# Altium PCB CSC v2.PcbDoc (part 2 of 2)
Units mm, origin at the board's own origin, x right, y up, seen from the top; angles counter-clockwise.
Board outline 100 x 70 mm, 4 copper layers (L1, L2, L3, L4), stack 0.592 mm thick; 124 components, 182 nets, 786 pads, 368 vias.
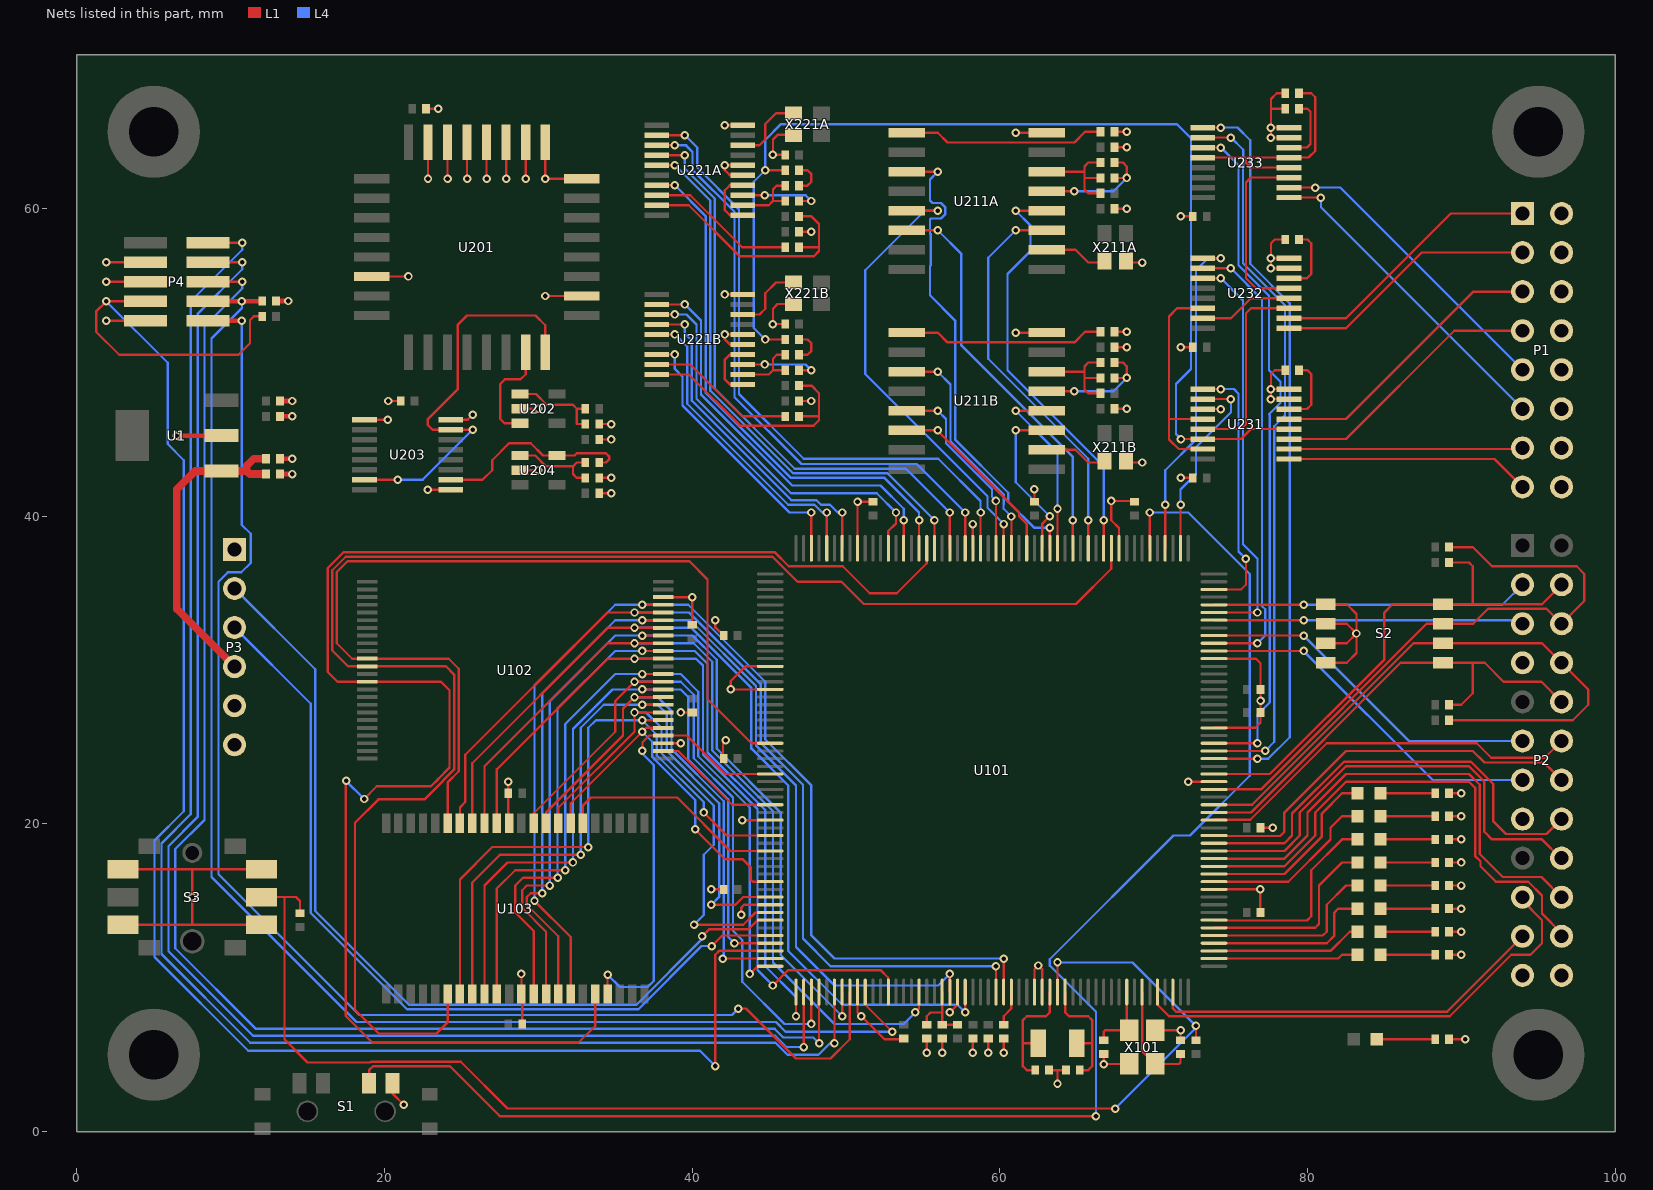
[diagram p4: the nets of this part, all layers, seen from the top]

## Via types
v1: diameter 0.55, hole 0.3, L1 to L4, tented both sides, 368 vias

## Nets (pads, with @x,y where several pads share a name; then routed paths per layer and width w, separated by ;. In a path a pad name is that pad's centre, name@x,y a point inside that pad or via, vN(x,y) a via of type N, cw(c..) or ccw(c..) an arc to the next point about the centre after c; other vN are vias at no path point) (continued)
BLS1: U101.139 U102.14 U103.40 | length 105.3
  L1 w0.15: v1(17.5,22.8) 17.475,22.775 17.475,7.525 19.225,5.775 32.6,5.775 33.7,6.875 U103.40@33.7,8.95 ; v1(18.675,21.625) 19.5,22.45 23.026,22.45 23.5,22.924 23.5,22.949 24.225,23.674 24.225,28.7 23.675,29.25 U102.14@18.875,29.25 16.944,29.25 16.3,29.894 16.3,36.626 17.349,37.675 45.349,37.675 46.274,36.75 49.793,36.75 51.543,35 51.957,35 53.3,35 55.25,36.95 U101.139@55.25,37.925
  L4 w0.15: v1(17.5,22.8) v1(18.675,21.625)
COMS.AFSK1.DET: U101.120 U211A.14 | length 26.3
  L1 w0.15: U211A.14@53.95,58.595 v1(55.96,58.595) ; U101.120@64.75,37.925 v1(64.75,39.75)
  L4 w0.15: v1(55.96,58.595) 57.5,57.055 57.5,51.112 64.75,43.862 v1(64.75,39.75)
COMS.AFSK1.M0: U101.118 U211A.3 | length 26.1
  L1 w0.15: v1(61.04,58.595) U211A.3@63.05,58.595 ; U101.118@65.75,37.925 v1(65.75,39.75)
  L4 w0.15: v1(61.04,58.595) 59.25,56.805 59.25,50.25 65.75,43.75 v1(65.75,39.75)
COMS.AFSK1.M1: U101.116 U211A.4 | length 27.6
  L1 w0.15: v1(61.04,59.865) U211A.4@63.05,59.865 ; U101.116@66.75,37.925 v1(66.75,39.75)
  L4 w0.15: v1(61.04,59.865) 62,58.905 62,57.25 60.5,55.75 60.5,49.5 66.75,43.25 v1(66.75,39.75)
COMS.AFSK1.RXD: U101.129 U211A.13 | length 30.1
  L1 w0.14: U101.129@60.25,37.925 v1(60.25,39.5)
  L1 w0.15: U211A.13@53.95,59.865 v1(55.96,59.865)
  L4 w0.14: v1(55.96,59.865) 55.115,59.865 51.25,56 51.25,49.25 59.21,41.29 59.21,40.54 v1(60.25,39.5)
COMS.AFSK1.TXD: U101.123 U211A.11 | length 32.1
  L1 w0.15: U211A.11@53.95,62.405 v1(55.96,62.405) ; U101.123@63.25,37.925 v1(63.25,39.25)
  L4 w0.15: v1(55.96,62.405) 55.46,61.905 55.46,60.535 55.63,60.365 56.167,60.365 56.46,60.072 56.46,59.658 56.167,59.365 55.519,59.365 55.46,59.306 55.46,58.388 55.5,58.348 55.5,56.302 55.46,56.262 55.46,54.369 57.095,52.734 57.095,44.996 60.55,41.541 60.55,40.95 62.25,39.25 v1(63.25,39.25)
COMS.AFSK2.DET: U101.126 U211B.14 | length 12.1
  L1 w0.15: U211B.14@53.95,45.595 v1(55.96,45.595) 55.96,45.54 61.25,40.25 61.25,40 61.75,39.5 U101.126@61.75,37.925
COMS.AFSK2.M0: U101.124 U211B.3 | length 10.8
  L1 w0.15: v1(61.04,45.595) U211B.3@63.05,45.595 ; U101.124@62.75,37.925 62.75,39.5 v1(63.25,40)
  L4 w0.15: v1(61.04,45.595) 61.04,42.21 v1(63.25,40)
COMS.AFSK2.M1: U101.122 U211B.4 | length 12.1
  L1 w0.15: v1(61.04,46.865) U211B.4@63.05,46.865 ; U101.122@63.75,37.925 v1(63.75,40.5)
  L4 w0.15: v1(61.04,46.865) 63.75,44.155 v1(63.75,40.5)
COMS.AFSK2.RXD: U101.130 U211B.13 | length 12.5
  L1 w0.14: U101.130@59.75,37.925 v1(59.75,41)
  L1 w0.15: U211B.13@53.95,46.865 v1(55.96,46.865)
  L4 w0.14: v1(55.96,46.865) 56.5,46.325 56.5,44.75 59.5,41.75 59.5,41.25 v1(59.75,41)
COMS.AFSK2.TXD: U101.128 U211B.11 | length 15.2
  L1 w0.14: U101.128@60.75,37.925 v1@60.75,39.75
  L1 w0.15: U211B.11@53.95,49.405 v1(55.96,49.405)
  L4 w0.14: 60.245,40.495 v1(60.75,39.99)
  L4 w0.15: v1(55.96,49.405) 56.795,48.57 56.795,44.872 60.25,41.417 60.25,40.793 60.245,40.788 60.245,40.495
COMS.DTMF1.Q1: U101.132 U221A.12 | length 41.8
  L1 w0.15: U221A.12@37.7,64.775 v1(39.525,64.775) ; U101.132@58.75,37.925 v1(58.75,40.25)
  L4 w0.15: v1(39.525,64.775) 40.325,63.975 40.325,62.675 43.05,59.95 43.05,47.95 47.25,43.75 56,43.75 58.75,41 v1(58.75,40.25)
COMS.DTMF1.Q2: U101.134 U221A.13 | length 40
  L1 w0.15: U221A.13@37.7,64.125 v1(38.875,64.125) ; U101.134@57.75,37.925 v1(57.75,40.25)
  L4 w0.15: v1(38.875,64.125) 39.625,64.125 39.625,64.082 40.025,63.682 40.025,62.524 42.75,59.799 42.75,47.75 47.1,43.4 54.6,43.4 v1(57.75,40.25)
COMS.DTMF1.Q3: U101.136 U221A.14 | length 38.7
  L1 w0.15: U221A.14@37.7,63.475 v1(39.525,63.475) ; U101.136@56.75,37.925 v1(56.75,40.25)
  L4 w0.15: v1(39.525,63.475) 39.525,62.599 41.475,60.649 41.475,48.298 46.673,43.1 53.9,43.1 v1(56.75,40.25)
COMS.DTMF1.Q4: U101.138 U221A.15 | length 36.7
  L1 w0.15: U221A.15@37.7,62.825 v1(38.875,62.825) ; U101.138@55.75,37.925 v1(55.75,39.75)
  L4 w0.15: v1(38.875,62.825) 41.175,60.525 41.175,48.174 46.549,42.8 52.7,42.8 v1(55.75,39.75)
COMS.DTMF1.STD: U101.140 U221A.17 | length 34.9
  L1 w0.15: U221A.17@37.7,61.525 v1(38.875,61.525) ; U101.140@54.75,37.925 v1(54.75,39.75)
  L4 w0.15: v1(38.875,61.525) 40.875,59.525 40.875,48.049 46.424,42.5 52.5,42.5 54.75,40.25 v1(54.75,39.75)
COMS.DTMF2.Q1: U101.142 U221B.12 | length 26.9
  L1 w0.15: U221B.12@37.7,53.775 v1(39.525,53.775) ; U101.142@53.75,37.925 v1(53.75,39.75)
  L4 w0.15: v1(39.525,53.775) 40.575,52.725 40.575,47.925 46.5,42 52.25,42 53.75,40.5 v1(53.75,39.75)
COMS.DTMF2.Q2: U101.144 U221B.13 | length 26.2
  L1 w0.15: U221B.13@37.7,53.125 v1(38.875,53.125) ; U101.144@52.75,37.925 52.75,39.043 53.25,39.543 v1(53.25,40.25)
  L4 w0.15: v1(38.875,53.125) 39.625,53.125 40.275,52.475 40.275,47.649 46.424,41.5 52,41.5 v1(53.25,40.25)
COMS.DTMF2.Q3: U101.150 U221B.14 | length 22.1
  L1 w0.15: U221B.14@37.7,52.475 v1(39.525,52.475) ; U101.150@49.75,37.925 v1(49.75,40.25)
  L4 w0.15: v1(39.525,52.475) 39.525,51.874 39.975,51.424 39.975,47.525 46.45,41.05 48.081,41.05 48.381,40.75 48.957,40.75 49.457,40.25 v1(49.75,40.25)
COMS.DTMF2.Q4: U101.152 U221B.15 | length 20.3
  L1 w0.15: U221B.15@37.7,51.825 v1(38.875,51.825) ; U101.152@48.75,37.925 v1(48.75,40.25)
  L4 w0.15: v1(38.875,51.825) 39.675,51.025 39.675,47.325 46.25,40.75 47.957,40.75 48.457,40.25 v1(48.75,40.25)
COMS.DTMF2.STD: U101.154 U221B.17 | length 18.3
  L1 w0.15: U221B.17@37.7,50.525 v1(38.875,50.525) ; U101.154@47.75,37.925 v1(47.75,40.25)
  L4 w0.15: v1(38.875,50.525) 38.875,49.575 39.375,49.075 39.375,47.201 46.326,40.25 v1(47.75,40.25)
COMS.SWC0: U101.108 U231.11 U232.9 | length 24.8
  L1 w0.15: U101.108@70.75,37.925 70.75,40.25 v1(70.75,40.75) ; U231.11@73.2,46.975 v1(74.375,46.975) ; U232.9@73.2,56.775 v1(74.375,56.775)
  L4 w0.15: v1(70.75,40.75) 70.75,43 72.75,45 72.75,46.975 ; v1(74.375,46.975) 72.75,46.975 ; v1(74.375,56.775) 73.525,56.775 72.75,56 72.75,46.975
COMS.SWC1: U101.106 U231.10 | length 12.9
  L1 w0.15: U101.106@71.75,37.925 v1(71.75,40.75) ; U231.10@73.2,47.625 v1(75.025,47.625)
  L4 w0.14: v1(71.75,40.75) 71.75,41.75 72.75,42.75 72.75,44.5 75.025,46.775 v1(75.025,47.625)
COMS.SWC2: U101.102 U231.9 | length 17.3
  L1 w0.14: U101.102@73.925,35.25 73.93,35.255 75.705,35.255 75.995,35.545 v1(75.995,37.245) v1@76,37.25
  L1 w0.15: U231.9@73.2,48.275 v1(74.375,48.275)
  L4 w0.14: v1(74.375,48.275) 75.225,48.275 75.52,47.98 75.52,37.72 v1(75.995,37.245)
COMS.SWC3: U101.99 U232.11 | length 26.7
  L1 w0.15: U232.11@73.2,55.475 v1(74.375,55.475) ; U101.99@73.925,33.75 v1(76.75,33.75)
  L4 w0.15: v1(74.375,55.475) 75.815,54.035 75.815,38.185 76.75,37.25 v1(76.75,33.75)
COMS.SWC4: U101.95 U232.10 | length 30.2
  L1 w0.15: U232.10@73.2,56.125 v1(75.025,56.125) ; U101.95@73.925,31.75 v1(76.75,31.75)
  L4 w0.15: v1(75.025,56.125) 77.05,54.1 77.05,34.157 77.25,33.957 77.25,32.25 v1(76.75,31.75)
COMS.SWC5: U101.82 U233.11 | length 45
  L1 w0.14: U101.82@73.925,25.25 76.5,25.25 v1(76.75,25.25)
  L1 w0.15: U233.11@73.2,63.975 v1(74.375,63.975)
  L4 w0.14: 75.52,62.83 75.52,56.33 77.5,54.35 77.5,49.5 78.25,48.75 78.25,47.39 77.5,46.64 77.545,46.595 77.545,27.895 76.75,27.1 v1(76.75,25.25)
  L4 w0.15: v1(74.375,63.975) 75.52,62.83
COMS.SWC6: U101.81 U233.10 | length 47
  L1 w0.15: U233.10@73.2,64.625 v1(75.025,64.625) ; U101.81@73.925,24.75 v1(77.25,24.75)
  L4 w0.15: v1(75.025,64.625) 75.82,63.83 75.82,62.701 75.815,62.696 75.815,56.452 78.545,53.722 78.545,46.563 77.84,45.858 77.84,25.34 v1(77.25,24.75)
COMS.SWC7: U101.80 U233.9 | length 48.8
  L1 w0.15: U233.9@73.2,65.275 v1(74.375,65.275) ; U101.80@73.925,24.25 v1(76.75,24.25)
  L4 w0.15: v1(74.375,65.275) 75.45,65.275 76.275,64.45 76.275,56.416 78.845,53.846 78.845,25.638 77.457,24.25 v1(76.75,24.25)
COUNTER_CLK: R202.1 U203.2 U204.5 | length 13.1
  L1 w0.15: U203.2@24.3,42.375 26.375,42.375 27,43 27,43.65 28.1,44.75 29.5,44.75 30.3,43.95 U204.5@31.2,43.95 32.35,43.95 32.5,44.1 34.4,44.1 34.6,43.9 34.6,43.7 34.4,43.5 R202.1@33.95,43.5
CS0: U101.187 U102.26 | length 8.4
  L1 w0.15: U102.26@38.125,24.75 39.1,24.75 42.6,21.25 U101.187@45.075,21.25
CS1: U101.193 U103.6 | length 15
  L1 w0.15: U103.6@32.9,20.05 32.9,21.2 33.425,21.725 39.025,21.725 42.5,18.25 U101.193@45.075,18.25
D0: U101.197 U102.29 U103.7 | length 24.2
  L1 w0.15: U103.7@32.1,20.05 32.1,21.35 v1(36.75,26) 37,26.25 U102.29@38.125,26.25 ; v1(40.2,19.65) 42.15,17.7 43.3,17.7 43.8,17.2 43.8,16.4 43.95,16.25 U101.197@45.075,16.25
  L4 w0.15: v1(36.75,26) 36.913,26.163 36.913,25.837 37.4,25.35 37.4,24.351 40.2,21.551 v1(40.2,19.65)
D1: U101.201 U102.31 U103.8 | length 33.5
  L1 w0.15: U103.8@31.3,20.05 31.3,21.05 36.25,26 v1(36.25,27.25) U102.31@38.125,27.25 ; v1(40.12,13.45) 43.325,13.45 44.125,14.25 U101.201@45.075,14.25
  L4 w0.15: v1(36.25,27.25) 37,27.25 38,26.25 38,24.6 41.4,21.2 41.4,18.65 40.75,18 40.75,14.08 v1(40.12,13.45) v1@40.005,13.335
D2: U101.207 U102.33 U103.9 | length 35.8
  L1 w0.15: U103.9@30.5,20.05 30.5,20.75 35.5,25.75 35.5,27.5 v1(36.25,28.25) U102.33@38.125,28.25 ; v1(42,11.25) U101.207@45.075,11.25
  L4 w0.15: v1(36.25,28.25) 37.75,28.25 38.656,27.344 38.656,24.874 42.05,21.48 42.05,11.3 v1(42,11.25)
D3: U101.3 U102.35 U103.10 | length 45.7
  L1 w0.15: U103.10@29.7,20.05 29.7,20.7 35,26 35,28 v1(36.25,29.25) U102.35@38.125,29.25 ; v1(47.75,7) U101.3@47.75,9.075
  L4 w0.15: v1(36.25,29.25) 39.25,29.25 40.1,28.4 40.1,24.279 42.65,21.729 42.65,13.057 43.25,12.457 43.25,9.75 46,7 v1(47.75,7)
D4: U101.13 U102.38 U103.13 | length 53.7
  L1 w0.15: U103.13@27.3,20.05 27.3,23.55 34.5,30.75 v1(36.25,30.75) U102.38@38.125,30.75 ; v1(45.25,9.5) 46.25,10.5 52.25,10.5 52.75,10 U101.13@52.75,9.075
  L4 w0.15: v1(36.25,30.75) 40.25,30.75 40.7,30.3 40.7,24.527 44.25,20.977 44.25,10.5 v1(45.25,9.5)
D5: U101.17 U102.40 U103.14 | length 58
  L1 w0.15: U103.14@26.5,20.05 26.5,23.75 34.5,31.75 v1(36.25,31.75) U102.40@38.125,31.75 ; v1(54.5,7.75) 54.75,8 U101.17@54.75,9.075
  L4 w0.15: v1(36.25,31.75) 40.099,31.75 41.3,30.549 41.3,24.776 45.25,20.826 45.25,11 49.25,7 53.75,7 v1(54.5,7.75)
D6: U101.23 U102.42 U103.15 | length 61.8
  L1 w0.15: U103.15@25.7,20.05 25.7,23.95 34.5,32.75 36.957,32.75 U102.42@38.125,32.75 ; v1(57.75,7.75) U101.23@57.75,9.075
  L4 w0.15: v1(36.25,32.75) 39.947,32.75 43.85,28.847 43.85,24.9 46.25,22.5 46.25,11.75 49.75,8.25 57.25,8.25 v1(57.75,7.75)
D7: U101.27 U102.44 U103.16 | length 64.1
  L1 w0.15: U103.16@24.9,20.05 24.9,21.075 25.25,21.425 25.25,24.5 34.5,33.75 v1(36.25,33.75) U102.44@38.125,33.75 ; U101.27@59.75,9.075 v1(59.75,10.75)
  L4 w0.15: v1(36.25,33.75) 39.796,33.75 44.45,29.096 44.45,25.3 47.2,22.55 47.2,12.55 49,10.75 v1(59.75,10.75)
D8: U101.191 U102.30 U103.29 | length 41.8
  L1 w0.15: U103.29@24.9,8.95 24.9,16.4 27,18.5 v1(33.25,18.5) ; v1(36.75,26.75) U102.30@38.125,26.75 ; v1(40.75,20.75) 42.25,19.25 U101.191@45.075,19.25
  L4 w0.15: v1(33.25,18.5) 33.25,26.25 33.75,26.75 v1(36.75,26.75) 37.7,25.8 37.7,24.476 40.75,21.426 40.75,21.05
D9: U101.199 U102.32 U103.30 | length 49.2
  L1 w0.15: U103.30@25.7,8.95 25.7,16.2 27.5,18 v1(32.75,18) ; v1(36.75,27.75) U102.32@38.125,27.75 ; v1(41.25,14.75) 42.818,14.75 43.318,15.25 U101.199@45.075,15.25
  L4 w0.15: v1(32.75,18) 32.75,26.25 34.25,27.75 v1(36.75,27.75) 37.75,27.75 38.356,27.144 38.356,24.75 41.75,21.356 41.75,15.25 v1(41.25,14.75)
D10: U101.205 U102.34 U103.31 | length 51.8
  L1 w0.15: U103.31@26.5,8.95 26.5,16 28,17.5 v1(32.25,17.5) ; v1(36.75,28.75) U102.34@38.125,28.75 ; v1(42.75,12.25) U101.205@45.075,12.25
  L4 w0.15: v1(32.25,17.5) 32.25,26.174 34.826,28.75 v1(36.75,28.75) 39.25,28.75 39.75,28.25 39.75,24.204 42.35,21.604 42.35,12.65 v1(42.75,12.25)
D11: U101.208 U102.36 U103.32 | length 54.4
  L1 w0.15: U103.32@27.3,8.95 27.3,15.8 28.5,17 v1(31.75,17) ; v1(36.75,29.75) U102.36@38.125,29.75 ; v1(43.75,10.25) 44.25,10.75 U101.208@45.075,10.75
  L4 w0.15: v1(31.75,17) 31.75,26.5 35,29.75 v1(36.75,29.75) 39.25,29.75 40.4,28.6 40.4,24.403 43.75,21.053 v1(43.75,10.25)
D12: U101.1 U102.39 U103.35 | length 62.1
  L1 w0.15: U103.35@29.7,8.95 29.7,13.05 28.5,14.25 28.5,16 29,16.5 v1(31.25,16.5) ; v1(36.75,31.25) U102.39@38.125,31.25 ; v1(46.75,7.5) U101.1@46.75,9.075 U101.1@46.75,9.75
  L4 w0.15: v1(31.25,16.5) 31.25,27.5 35,31.25 v1(36.75,31.25) 40.174,31.25 41,30.424 41,24.651 44.75,20.901 44.75,10.75 46.75,8.75 v1(46.75,7.5)
D13: U101.7 U102.41 U103.36 | length 64.1
  L1 w0.15: U103.36@30.5,8.95 30.5,13 28.95,14.55 28.95,15.7 29.25,16 v1(30.75,16) ; v1(36.75,32.25) U102.41@38.125,32.25 ; v1(49.75,7.5) U101.7@49.75,9.075
  L4 w0.15: v1(30.75,16) 30.75,28 35,32.25 v1(36.75,32.25) 38.125,32.25 40.023,32.25 41.6,30.673 41.6,24.9 45.75,20.75 45.75,11.5 v1(49.75,7.5)
D14: U101.21 U102.43 U103.37 | length 70.8
  L1 w0.15: v1(30.25,15.5) 29.5,15.5 29.25,15.25 29.25,14.75 31.3,12.7 U103.37@31.3,8.95 ; v1(36.75,33.25) U102.43@38.125,33.25 ; U101.21@56.75,9.075 v1(56.75,10.25)
  L4 w0.15: v1(30.25,15.5) 30.25,28.5 35,33.25 v1(36.75,33.25) 38.125,33.25 39.871,33.25 44.15,28.971 44.15,25.1 46.75,22.5 46.75,12 49.25,9.5 56,9.5 v1(56.75,10.25)
D15: U101.28 U102.45 U103.38 | length 74.7
  L1 w0.15: v1(29.75,15) 32.1,12.65 U103.38@32.1,8.95 ; v1(36.75,34.25) U102.45@38.125,34.25 ; U101.28@60.25,9.075 v1(60.25,11.25)
  L4 w0.15: v1(29.75,15) 29.75,29 35,34.25 v1(36.75,34.25) 39.75,34.25 44.75,29.25 44.75,25.5 47.75,22.5 47.75,12.75 49.25,11.25 v1(60.25,11.25)
DTMF_RX: C221A.2 C221B.2 U231.4 U231.14 | length 72.1
  L1 w0.15: v1(44.75,51.5) C221B.2@46.05,51.5 ; v1(44.75,62.5) C221A.2@46.05,62.5 ; v1(71.775,45.025) U231.14@73.2,45.025 75.675,45.025 76.325,45.675 U231.4@78.8,45.675
  L4 w0.15: v1(44.75,51.5) 44,52.25 44,61.75 v1(44.75,62.5) 44.75,64.475 45.775,65.5 71.5,65.5 72.425,64.575 72.425,49.575 71.45,48.6 71.45,45.35 v1(71.775,45.025)
EXT0: P2.4 R1.2 S2.8 U101.78 | length 33.6
  L1 w0.15: U101.78@73.925,23.25 77.553,23.25 85,30.697 85,33.75 85.545,34.295 90.75,34.295 ; R1.2@89.2,37 90.5,37 90.75,36.75 90.75,34.295 ; P2.4@96.52,35.56 95.25,34.29 94.513,34.29 94.508,34.295 90.75,34.295
EXT1: P2.6 R2.2 S2.7 U101.76 | length 41.2
  L1 w0.15: U101.76@73.925,22.25 76.977,22.25 87.747,33.02 S2.7@88.81,33.02 90.77,33.02 91.745,33.995 94.384,33.995 94.389,33.99 95.374,33.99 95.379,33.995 95.545,33.995 P2.6@96.52,33.02 98,34.5 98,36.25 97.5,36.75 92,36.75 90.75,38 R2.2@89.2,38
EXT2: P2.8 R3.2 S2.6 U101.74 | length 40.4
  L1 w0.15: U101.74@73.925,21.25 76.401,21.25 86.901,31.75 S2.6@88.81,31.75 95.25,31.75 P2.8@96.52,30.48 98.25,28.75 98.25,27.75 97.25,26.75 R3.2@89.2,26.75
EXT3: P2.10 R4.2 S2.5 U101.73 | length 31.5
  L1 w0.15: U101.73@73.925,20.75 76.326,20.75 86.056,30.48 S2.5@88.81,30.48 90.75,30.48 ; R4.2@89.2,27.75 90,27.75 90.75,28.5 90.75,30.48 ; P2.10@96.52,27.94 95.21,29.25 92.75,29.25 91.52,30.48 90.75,30.48
EXT4: P2.12 U101.72 | length 25.5
  L1 w0.15: U101.72@73.925,20.25 73.95,20.275 76.275,20.275 81.25,25.25 91,25.25 91.95,24.3 95.42,24.3 P2.12@96.52,25.4
EXT5: P2.14 U101.70 | length 26.4
  L1 w0.15: U101.70@73.925,19.25 73.95,19.225 78.225,19.225 78.5,19.5 78.5,20.75 82.5,24.75 90.75,24.75 91.5,24 95.38,24 P2.14@96.52,22.86
EXT6: P2.16 U101.69 | length 29.4
  L1 w0.15: U101.69@73.925,18.75 78.5,18.75 79,19.25 79,20.674 82.376,24.05 90.624,24.05 92.087,22.587 92.087,20.163 92.905,19.345 95.545,19.345 P2.16@96.52,20.32
EXT7: P2.18 U101.68 | length 30.1
  L1 w0.15: U101.68@73.925,18.25 78.5,18.25 79.5,19.25 79.5,20.75 82.5,23.75 90.5,23.75 91.5,22.75 91.5,19.5 92,19 95.25,19 96.47,17.78 P2.18@96.52,17.78
EXT8: P2.20 U101.67 | length 31.7
  L1 w0.15: U101.67@73.925,17.75 78.5,17.75 80,19.25 80,20.75 82.5,23.25 90.5,23.25 91.2,22.55 91.2,18.05 92.7,16.55 95.21,16.55 P2.20@96.52,15.24
EXT9: P2.22 U101.66 | length 33.5
  L1 w0.15: U101.66@73.925,17.25 78.5,17.25 80.5,19.25 80.5,20.75 82.5,22.75 90.5,22.75 90.9,22.35 90.9,17.926 91.25,17.576 91.25,17.25 92.25,16.25 94.349,16.25 95.25,15.349 95.25,14.174 96.52,12.904 P2.22@96.52,12.7
FTDI.CTS: P3.5
FTDI.DTR: P3.1
FTDI.RXI: P3.2 U101.202 | length 57.6
  L1 w0.15: v1(40.64,12.7) 41.09,13.15 43.65,13.15 44.25,13.75 U101.202@45.075,13.75
  L4 w0.15: P3.2@10.25,35.31 15.5,30.06 15.5,14.345 21.59,8.255 36.379,8.255 40.64,12.516 v1(40.64,12.7)
FTDI.TXO: P3.3 U101.204 | length 55.1
  L1 w0.15: v1(41.275,12.065) 41.96,12.75 42.545,12.75 U101.204@45.075,12.75
  L4 w0.15: P3.3@10.25,32.77 15.2,27.82 15.2,14.221 21.466,7.955 36.504,7.955 40.614,12.065 v1(41.275,12.065)
GMSK1_RX: P1.13 U231.2 | length 15.2
  L1 w0.15: U231.2@78.8,44.375 82.5,44.375 93.905,44.375 P1.13@93.98,44.45
GMSK1_TX: P1.9 U233.2 | length 20.1
  L1 w0.15: U233.2@78.8,61.375 v1(80.5,61.375)
  L4 w0.15: v1(80.5,61.375) 82.135,61.375 P1.9@93.98,49.53
GMSK2_RX: P1.15 U231.1 | length 15.9
  L1 w0.15: U231.1@78.8,43.725 92.165,43.725 P1.15@93.98,41.91
GMSK2_TX: P1.11 U233.1 | length 21.9
  L1 w0.15: U233.1@78.8,60.725 v1(80.875,60.725)
  L4 w0.15: v1(80.875,60.725) 80.875,60.095 P1.11@93.98,46.99 P1.11@93.98,47.62
GND: C1.1 C2.1 C3.1 C4.1 C101.1 C102.1 C103.1 C104.1 C105.1 C106.1 C107.1 C108.1 C109.1 C110.1 C111.1 C112.1 C113.1 C114.1 C115.1 C116.1 C117.1 C118.1 C119.1 C120.2 C121.1 C122.2 C123.1 C201.2 C202.2 C203.2 C204.1 C205.1 C206.1 C211A.1 C211B.1 C212A.1 C212B.1 C214A.1 C214B.1 C222A.1 C222B.1 C224A.2 C224B.2 C231.1 C232.1 C233.1 P1.2 P1.4 P1.6 P1.8 P1.10 P1.12 P1.14 P1.16 P2.7 P2.15 P2.23 P2.24 P3.6 P4.3 P4.5 P4.9 R6.2 R7.2 R8.2 R9.2 R10.2 R11.2 R12.2 R13.2 R14.2 R101.2 R104.2 R231.2 R232.2 R233.2 R234.1 S1.4 S2.1 S2.2 S2.3 S2.4 S3.1 S3.3 S3.4 S3.6 U1.2 U101.9 U101.22 U101.32 U101.33 U101.63 U101.77 U101.84 U101.93 U101.114 U101.133 U101.148 U101.169 U101.172 U101.189 U101.200 U102.27 U102.46 U103.12 U103.34 U201.2 U201.14 U201.20 U201.21 U201.22 U201.23 U201.24 U201.25 U201.26 U201.27 U202.2 U203.1 U203.8 U203.9 U204.2 U211A.8 U211B.8 U221A.5 U221A.6 U221A.10 U221B.5 U221B.6 U221B.10 U231.7 U231.8 U232.7 U232.8 U233.7 U233.8 X101.3 X211A.2 X211B.2 X221A.2 X221B.2 | length 214
  L1 w0.15: v1@1.905,52.705 v1(1.91,52.71) P4.9@4.468,52.71 ; v1(1.905,55.245) 1.91,55.25 P4.5@4.468,55.25 ; v1(1.91,56.52) P4.3@4.468,56.52 ; S3.1@3,13.45 7.5,13.45 ; S3.3@3,17.05 7.5,17.05 ; S3.4@12,13.45 7.5,13.45 ; S3.6@12,17.05 7.5,17.05 ; U203.9@18.7,46.275 v1(20.2,46.275) ; U201.2@19.175,55.595 v1(21.555,55.595) ; v1(20.25,47.5) C203.2@21.05,47.5 ; S1.4@20.523,3.15 20.523,2.477 v1(21.25,1.75) ; C201.2@22.7,66.5 v1(23.5,66.5) ; v1(22.8,41.725) U203.1@24.3,41.725 ; v1(22.825,61.945) U201.27@22.825,64.325 ; v1(24.095,61.945) U201.26@24.095,64.325 ; U203.8@24.3,46.275 25.4,46.275 v1(25.725,46.6) ; v1(25.365,61.945) U201.25@25.365,64.325 ; v1(26.635,61.945) U201.24@26.635,64.325 ; v1(27.905,61.945) U201.23@27.905,64.325 ; U103.12@28.05,20.1 C116.1@28.05,22 v1(28.05,22.75) ; U204.2@28.8,43 v1(30,43) ; U202.2@28.8,47 v1(30,47) ; U103.34@28.9,8.95 v1(28.9,10.25) ; C117.1@28.95,7 U103.34@28.95,8.9 ; v1(29.175,61.945) U201.22@29.175,64.325 ; v1(30.445,54.325) U201.14@32.825,54.325 ; U201.21@30.445,64.325 v1(30.445,61.945) U201.20@32.825,61.945 ; C204.1@33.95,41.5 v1(34.75,41.5) ; C206.1@33.95,42.5 v1(34.75,42.5) ; C202.2@33.95,45 v1(34.75,45) ; C205.1@33.95,46 v1(34.75,46) ; U102.27@38.125,25.25 v1(39.25,25.25) ; U102.46@38.125,34.75 v1(40,34.75) C118.1@40,33.2 ; v1(39.25,27.25) C119.1@40,27.25 ; v1(41.25,15.75) C113.1@42.05,15.75 ; v1(41.5,33.25) 41.5,32.75 41.55,32.75 C111.1@42.05,32.25 ; v1@42,25.25 42,24.3 C112.1@42.05,24.25 ; v1(42.125,54.425) U221B.10@43.3,54.425 ; v1(42.125,65.425) U221A.10@43.3,65.425 ; v1(42.175,25.45) v1@42.175,25.65 ; v1(43.2,14.1) 43.2,14.575 43.375,14.75 U101.200@45.075,14.75 ; v1(43.25,20.25) U101.189@45.075,20.25 ; U221B.5@43.3,51.175 42.45,51.175 42.125,51.5 v1(42.125,51.825) U221B.6@43.3,51.825 ; U221A.5@43.3,62.175 42.45,62.175 42.125,62.5 v1(42.125,62.825) U221A.6@43.3,62.825 ; U101.172@45.075,28.75 v1(42.5,28.75) 42.5,29.275 43.475,30.25 U101.169@45.075,30.25 ; C224B.2@46.05,52.5 v1(45.25,52.5) 45.25,53.5 45.55,53.8 X221B.2@46.6,53.8 ; C224A.2@46.05,63.5 v1(45.25,63.5) 45.25,64.5 45.55,64.8 X221A.2@46.6,64.8 ; C222B.1@46.95,47.5 v1(47.75,47.5) ; C222A.1@46.95,58.5 v1(47.75,58.5) ; U101.9@50.75,9.075 50.75,7.75 v1(51,7.5) 52.5,6 53.7,6 C101.1@53.75,6.05 ; U101.148@50.75,37.925 v1(50.75,40.95) C110.1@51.75,40.95 ; v1(55.25,5.125) C115.1@55.25,6.05 ; v1(56.25,5.125) C114.1@56.25,6.05 ; v1(56.75,7.75) 57.25,8.25 U101.22@57.25,9.075 ; v1(58.25,5.125) C102.1@58.25,6.05 ; U101.133@58.25,37.925 v1(58.25,39.5) ; v1(59.25,5.125) C103.1@59.25,6.05 ; v1(60.25,5.125) R101.2@60.25,6 ; v1(61.04,51.945) U211B.8@63.05,51.945 ; v1(61.04,64.945) U211A.8@63.05,64.945 ; U101.32@62.25,9.075 62.25,10.55 v1(62.5,10.8) 62.75,10.55 U101.33@62.75,9.075 U101.33@62.75,8.25 ; C109.1@62.25,40.95 v1(62.25,41.75) ; C122.2@63.25,4 C123.1@64.3,4 ; v1(63.75,3.125) 63.75,3.975 ; C120.2@66.75,5.05 66.75,4.4 X101.3@68.15,4.4 ; v1@67.25,40.95 67.25,39.75 67.75,39.25 U101.114@67.75,37.925 ; v1(67.25,41) 68.7,41 C108.1@68.75,40.95 ; C212B.1@67.45,47 v1(68.25,47) ; C211B.1@67.45,51 v1(68.25,51) ; C214B.1@67.45,52 v1(68.25,52) ; C212A.1@67.45,60 v1(68.25,60) ; C211A.1@67.45,64 v1(68.25,64) ; C214A.1@67.45,65 v1(68.25,65) ; X211B.2@68.2,43.6 68.3,43.5 v1(69.25,43.5) ; X211A.2@68.2,56.6 68.3,56.5 v1(69.25,56.5) ; X101.3@69.85,6.6 X101.3@70.1,6.6 v1(71.75,6.6) C121.1@71.75,5.95 ; v1(71.75,42.5) C231.1@72.55,42.5 ; v1(71.75,51) C232.1@72.55,51 ; v1(71.75,59.5) C233.1@72.55,59.5 ; v1(72.25,22.75) U101.77@73.925,22.75 ; U101.63@73.925,15.75 v1(76.925,15.75) C104.1@76.925,14.275 ; U101.84@73.925,26.25 76.6,26.25 76.95,26.6 v1(76.95,28) C107.1@76.95,28.75 76.95,30.45 76.65,30.75 U101.93@73.925,30.75 ; C105.1@76.95,19.75 v1(77.75,19.75) ; R231.2@78.55,49.5 77.875,49.5 77.625,49.25 v1(77.625,48.275) ; R232.2@78.55,58 77.875,58 77.625,57.75 v1(77.625,56.775) ; R233.2@78.55,66.5 77.625,66.5 ; R234.1@78.55,67.5 78,67.5 77.625,67.125 77.625,66.5 ; U231.7@78.8,47.625 v1(77.625,47.625) v1(77.625,48.275) ; U231.8@78.8,48.275 v1(77.625,48.275) ; U232.7@78.8,56.125 v1(77.625,56.125) v1(77.625,56.775) ; U232.8@78.8,56.775 v1(77.625,56.775) ; U233.7@78.8,64.625 v1(77.625,64.625) v1(77.625,65.275) ; U233.8@78.8,65.275 v1(77.625,65.275) ; S2.4@81.19,30.48 82.55,30.48 83.185,31.115 v1(83.185,32.385) ; S2.3@81.19,31.75 82.55,31.75 v1(83.185,32.385) ; S2.2@81.19,33.02 82.55,33.02 v1(83.185,32.385) ; S2.1@81.19,34.29 82.55,34.29 83.185,33.655 v1(83.185,32.385) ; R14.2@89.2,6 v1(90.25,6) ; R13.2@89.2,11.5 v1(90,11.5) ; R12.2@89.2,13 v1(90,13) ; R11.2@89.2,14.5 v1(90,14.5) ; R10.2@89.2,16 v1(90,16) ; R9.2@89.2,17.5 v1(90,17.5) ; R8.2@89.2,19 v1(90,19) ; R7.2@89.2,20.5 v1(90,20.5) ; R6.2@89.2,22 v1(90,22) ; 7.5,13.45 v1(7.5,15.25) 7.5,17.05 ; v1(77.625,65.275) 77.625,66.5
  L1 w0.3: v1(6.5,45.25) U1.2@9.4,45.25 ; R104.2@12.95,54 v1(13.75,54) ; C4.1@13.2,42.75 v1(14,42.75) ; C3.1@13.2,43.75 v1(14,43.75) ; C2.1@13.2,46.5 v1(14,46.5) ; C1.1@13.2,47.5 v1(14,47.5)
  other v1: 66.75,4.375
I2C0.SCL: P2.19 U101.48 | length 31.6
  L1 w0.15: U101.48@70.25,9.075 70.25,8.25 71,7.5 89.25,7.5 93.25,11.5 94.5,11.5 95.25,12.25 95.25,13.75 93.98,15.02 P2.19@93.98,15.24
I2C0.SDA: P2.21 U101.50 | length 25.9
  L1 w0.15: U101.50@71.25,9.075 71.25,8 71.45,7.8 89.08,7.8 P2.21@93.98,12.7
I2C1.SCL: P2.11 U101.96 | length 22.9
  L1 w0.15: U101.96@73.925,32.25 78.75,32.25 v1(79.75,32.25)
  L4 w0.15: v1(79.75,32.25) 86.6,25.4 P2.11@93.98,25.4
I2C1.SDA: P2.13 U101.94 | length 23.5
  L1 w0.15: U101.94@73.925,31.25 v1(79.75,31.25)
  L4 w0.15: v1(79.75,31.25) 88.14,22.86 P2.13@93.98,22.86
I2C2.SCL: P2.3 U101.100 | length 20.6
  L1 w0.15: U101.100@73.925,34.25 v1(79.75,34.25)
  L4 w0.15: v1(79.75,34.25) 92.67,34.25 P2.3@93.98,35.56
I2C2.SDA: P2.5 U101.98 | length 20.2
  L1 w0.15: U101.98@73.925,33.25 v1(79.75,33.25)
  L4 w0.15: v1(79.75,33.25) 93.75,33.25 P2.5@93.98,33.02
JTAG.RTCK: P4.7 R103.1 U101.206 | length 113.8
  L1 w0.15: v1(1.905,53.975) 1.25,53.32 1.25,52 2.75,50.5 10.5,50.5 11.25,51.25 11.25,52.75 11.5,53 R103.1@12.05,53 ; v1@2.02,53.98 P4.7@4.468,53.98 ; v1(41.5,4.265) 41.5,11.5 41.75,11.75 U101.206@45.075,11.75
  L4 w0.15: v1(1.905,53.975) 5.9,49.98 5.9,44.7 6.95,43.65 6.95,20.828 5.05,18.928 5.05,11.36 11.145,5.265 40.5,5.265 v1(41.5,4.265) v1@41.5,4.25
JTAG.T\R\S\T\: P4.10 U101.8 | length 89.7
  L1 w0.15: v1(43,8) 43.5,8 46.75,4.75 49,4.75 50.25,6 U101.8@50.25,9.075
  L1 w0.3: P4.10@8.532,52.71 v1(10.71,52.71)
  L4 w0.15: v1(10.71,52.71) 10.71,39.455 11.3,38.865 11.3,36.976 10.684,36.36 9.815,36.36 9.2,35.745 9.2,16.737 18.357,7.58 42.585,7.58 42.585,7.585 v1(43,8)
JTAG.TCK: P4.8 R104.1 U101.10 | length 93.5
  L1 w0.15: U101.10@51.25,9.075 51.25,8.25 v1(53,6.5)
  L1 w0.3: P4.8@8.532,53.98 v1(10.73,53.98) R104.1@12.03,53.98
  L4 w0.15: v1(10.73,53.98) 10.73,53.543 8.75,51.563 8.75,16.55 18.17,7.13 45.446,7.13 46.076,6.5 v1(53,6.5)
JTAG.TDI: P4.6 U101.4 | length 95.1
  L1 w0.15: P4.6@8.532,55.25 v1(10.75,55.25) ; v1(48.25,5.75) U101.4@48.25,9.075
  L4 w0.15: v1(10.75,55.25) 10.75,54.813 8.3,52.363 8.3,20.269 6.4,18.369 6.4,11.919 11.639,6.68 45.365,6.68 45.92,6.125 47.875,6.125 v1(48.25,5.75)
JTAG.TDO: P4.4 U101.2 | length 96.5
  L1 w0.15: P4.4@8.532,56.52 v1(10.75,56.52) ; v1(47.25,5.5) U101.2@47.25,9.075
  L4 w0.15: v1(10.75,56.52) 10.75,56.063 7.85,53.163 7.85,20.455 5.95,18.555 5.95,11.733 11.453,6.23 45.391,6.23 46.121,5.5 v1(47.25,5.5)
JTAG.TMS: P4.2 U101.6 | length 100.7
  L1 w0.15: P4.2@8.532,57.79 v1(10.75,57.79) ; v1(49.25,5.75) U101.6@49.25,9.075
  L4 w0.15: v1(10.75,57.79) 10.75,57.333 7.4,53.983 7.4,20.641 5.5,18.741 5.5,11.547 11.267,5.78 45.417,5.78 46.197,5 48.207,5 48.957,5.75 v1(49.25,5.75)
LED0: D1.1 U101.65 | length 12.4
  L1 w0.15: U101.65@73.925,16.75 78.5,16.75 80.937,19.187 80.937,20.687 82.25,22 D1.1@83.25,22
LED1: D2.1 U101.64 | length 11.5
  L1 w0.15: U101.64@73.925,16.25 78.75,16.25 81.5,19 81.5,19.75 82.25,20.5 D2.1@83.25,20.5
LED2: D3.1 U101.59 | length 13.3
  L1 w0.15: U101.59@73.925,13.75 73.95,13.725 79.975,13.725 80.25,14 80.25,17 82.25,19 D3.1@83.25,19
LED3: D4.1 U101.58 | length 12.5
  L1 w0.15: U101.58@73.925,13.25 80.5,13.25 80.75,13.5 80.75,16 82.25,17.5 D4.1@83.25,17.5
LED4: D5.1 U101.57 | length 11.7
  L1 w0.15: U101.57@73.925,12.75 81,12.75 81.25,13 81.25,14.75 82.5,16 D5.1@83.25,16
LED5: D6.1 U101.56 | length 11.1
  L1 w0.15: U101.56@73.925,12.25 81.25,12.25 81.75,12.75 81.75,14.25 82,14.5 D6.1@83.25,14.5
LED6: D7.1 U101.55 | length 9.8
  L1 w0.15: U101.55@73.925,11.75 81.5,11.75 82.75,13 D7.1@83.25,13
LED7: D8.1 U101.54 | length 9.4
  L1 w0.15: U101.54@73.925,11.25 82,11.25 82.25,11.5 D8.1@83.25,11.5
NetC3_2: C3.2 C4.2 P3.4 U1.1 | length 21.2
  L1 w0.5: P3.4@10.25,30.23 6.5,33.98 6.5,41.75 7.7,42.95 U1.1@9.4,42.95 11.05,42.95 ; C4.2@12.3,42.75 11.25,42.75 11.05,42.95 ; C3.2@12.3,43.75 11.5,43.75 11.05,43.3 11.05,42.95
NetC114_2: C114.2 C115.2 FB101.2 U101.20 | length 4.8
  L1 w0.15: C115.2@55.25,6.95 55.25,7.5 55.5,7.75 56.25,7.75 ; U101.20@56.25,9.075 56.25,7.75 ; FB101.2@57.25,6.95 C114.2@56.25,6.95 56.25,7.75
NetC120_1: C120.1 U101.44 X101.1 | length 4.5
  L1 w0.15: C120.1@66.75,5.95 66.75,6.5 66.85,6.6 68.15,6.6 68.25,6.7 U101.44@68.25,9.075
NetC121_2: C121.2 U101.46 X101.2 | length 7.4
  L1 w0.15: U101.46@69.25,9.075 69.25,5.25 69.85,4.65 69.85,4.4 X101.2@70.1,4.4 71.65,4.4 71.75,4.5 C121.2@71.75,5.05
NetC122_1: C122.1 U101.34 X102.2 | length 8.2
  L1 w0.15: C122.1@62.3,4 61.75,4 61.5,4.25 61.5,5.75 ; X102.2@62.5,5.75 61.5,5.75 ; U101.34@63.25,9.075 63.25,7.75 63,7.5 61.75,7.5 61.5,7.25 61.5,5.75
NetC123_2: C123.2 U101.36 X102.1 | length 8.2
  L1 w0.15: U101.36@64.25,9.075 64.25,7.75 64.5,7.5 65.75,7.5 66,7.25 66,5.75 ; X102.1@65,5.75 66,5.75 ; C123.2@65.2,4 65.75,4 66,4.25 66,5.75
NetC205_2: C205.2 R201.2 U202.1 | length 6.2
  L1 w0.15: U202.1@28.8,47.95 29.85,47.95 30.55,47.25 32.25,47.25 32.5,47 ; C205.2@33.05,46 32.524,46 32.5,46.024 32.5,47 ; R201.2@33.05,47 32.5,47
NetC206_2: C206.2 R202.2 U204.1 | length 6
  L1 w0.15: U204.1@28.8,43.95 29.8,43.95 30.5,43.25 32.25,43.25 ; C206.2@33.05,42.5 32.5,42.5 32.25,42.75 32.25,43.25 ; R202.2@33.05,43.5 32.5,43.5 32.25,43.25
NetC213A_1: C213A.1 R212A.2 U211A.5 | length 8
  L1 w0.15: U211A.5@63.05,61.135 v1(64.85,61.135) ; R212A.2@67.45,62 v1(68.25,62) 68.25,62.75 68,63 C213A.1@67.45,63
  L4 w0.15: v1(64.85,61.135) 67.385,61.135 v1(68.25,62)
NetC213A_2: C213A.2 R211A.1 R212A.1 U211A.6 | length 7.3
  L1 w0.15: U211A.6@63.05,62.405 65.5,62.405 ; R211A.1@66.55,61 65.75,61 65.5,61.25 65.5,62 ; R212A.1@66.55,62 65.5,62 ; C213A.2@66.55,63 65.75,63 65.5,62.75 65.5,62.405 ; 65.5,62 65.5,62.405
NetC213B_1: C213B.1 R212B.2 U211B.5 | length 8
  L1 w0.15: U211B.5@63.05,48.135 v1(64.85,48.135) ; R212B.2@67.45,49 v1(68.25,49) 68.25,49.75 68,50 C213B.1@67.45,50
  L4 w0.15: v1(64.85,48.135) 67.385,48.135 v1(68.25,49)
NetC213B_2: C213B.2 R211B.1 R212B.1 U211B.6 | length 7.3
  L1 w0.15: U211B.6@63.05,49.405 65.5,49.405 ; R211B.1@66.55,48 65.75,48 65.5,48.25 65.5,49 ; R212B.1@66.55,49 65.5,49 ; C213B.2@66.55,50 65.75,50 65.5,49.75 65.5,49.405 ; 65.5,49 65.5,49.405
NetC214A_2: C214A.2 U211A.9 | length 13.1
  L1 w0.15: U211A.9@53.95,64.945 55.96,64.945 56.595,64.31 64.85,64.31 65.54,65 C214A.2@66.55,65
NetC214B_2: C214B.2 U211B.9 | length 13.1
  L1 w0.15: U211B.9@53.95,51.945 55.96,51.945 56.595,51.31 64.85,51.31 65.54,52 C214B.2@66.55,52
NetC221A_1: C221A.1 R221A.1 | length 2.3
  L1 w0.15: R221A.1@46.95,61.5 47.5,61.5 47.75,61.75 47.75,62.25 47.5,62.5 C221A.1@46.95,62.5
NetC221B_1: C221B.1 R221B.1 | length 2.3
  L1 w0.15: R221B.1@46.95,50.5 47.5,50.5 47.75,50.75 47.75,51.25 47.5,51.5 C221B.1@46.95,51.5
NetC223A_2: C223A.2 R222A.1 U221A.19 | length 16.6
  L1 w0.15: U221A.19@37.7,60.225 39.775,60.225 43.1,56.9 47.9,56.9 48.25,57.25 48.25,57.5 ; R222A.1@46.95,57.5 48.25,57.5 ; C223A.2@46.95,59.5 47.75,59.5 48.25,59 48.25,57.5
NetC223B_2: C223B.2 R222B.1 U221B.19 | length 16.6
  L1 w0.15: U221B.19@37.7,49.225 39.775,49.225 43.1,45.9 47.9,45.9 48.25,46.25 48.25,46.5 ; R222B.1@46.95,46.5 48.25,46.5 ; C223B.2@46.95,48.5 47.75,48.5 48.25,48 48.25,46.5
NetD1_2: D1.2 R6.1 | length 3.6
  L1 w0.15: D1.2@84.75,22 R6.1@88.3,22
NetD2_2: D2.2 R7.1 | length 3.6
  L1 w0.15: D2.2@84.75,20.5 R7.1@88.3,20.5
NetD3_2: D3.2 R8.1 | length 3.6
  L1 w0.15: D3.2@84.75,19 R8.1@88.3,19
NetD4_2: D4.2 R9.1 | length 3.6
  L1 w0.15: D4.2@84.75,17.5 R9.1@88.3,17.5
NetD5_2: D5.2 R10.1 | length 3.6
  L1 w0.15: D5.2@84.75,16 R10.1@88.3,16
NetD6_2: D6.2 R11.1 | length 3.6
  L1 w0.15: D6.2@84.75,14.5 R11.1@88.3,14.5
NetD7_2: D7.2 R12.1 | length 3.6
  L1 w0.15: D7.2@84.75,13 R12.1@88.3,13
NetD8_2: D8.2 R13.1 | length 3.6
  L1 w0.15: D8.2@84.75,11.5 R13.1@88.3,11.5
NetD9_2: D9.2 R14.1 | length 3.8
  L1 w0.15: D9.2@84.5,6 R14.1@88.3,6
NetR5_2: R5.2 R102.1 S3.5 U101.35 | length 89.7
  L1 w0.15: S3.5@12,15.25 13.5,15.25 ; R5.2@14.5,14.2 14.5,15 14.25,15.25 13.5,15.25 ; U101.35@63.75,9.075 v1(63.75,11) ; v1(67.5,1.5) 28,1.5 24.95,4.55 19.126,4.55 19.076,4.5 15,4.5 13.5,6 13.5,15.25 ; R102.1@72.75,5.95 v1(72.75,6.875)
  L4 w0.15: v1(63.75,11) 68.625,11 v1(72.75,6.875) 72.75,6.75 v1(67.5,1.5)
NetR101_1: R101.1 U101.29 | length 2.3
  L1 w0.15: R101.1@60.25,6.95 60.25,7.5 60.75,8 U101.29@60.75,9.075
NetR221A_2: R221A.2 R223A.1 U221A.2 | length 4.5
  L1 w0.15: U221A.2@43.3,60.225 44.975,60.225 45.25,60.5 ; R223A.1@46.05,60.5 45.25,60.5 ; R221A.2@46.05,61.5 45.5,61.5 45.25,61.25 45.25,60.5
NetR221B_2: R221B.2 R223B.1 U221B.2 | length 4.5
  L1 w0.15: U221B.2@43.3,49.225 44.975,49.225 45.25,49.5 ; R223B.1@46.05,49.5 45.25,49.5 ; R221B.2@46.05,50.5 45.5,50.5 45.25,50.25 45.25,49.5
NetR222A_2: R222A.2 U221A.18 | length 9.7
  L1 w0.15: U221A.18@37.7,60.875 39.875,60.875 43.25,57.5 R222A.2@46.05,57.5
NetR222B_2: R222B.2 U221B.18 | length 9.7
  L1 w0.15: U221B.18@37.7,49.875 39.875,49.875 43.25,46.5 R222B.2@46.05,46.5
NetR223A_2: R223A.2 U221A.3 | length 5.4
  L1 w0.15: U221A.3@43.3,60.875 v1(44.725,60.875) ; R223A.2@46.95,60.5 v1(47.75,60.5)
  L4 w0.15: v1(44.725,60.875) 47.375,60.875 v1(47.75,60.5)
NetR223B_2: R223B.2 U221B.3 | length 5.4
  L1 w0.15: U221B.3@43.3,49.875 v1(44.725,49.875) ; R223B.2@46.95,49.5 v1(47.75,49.5)
  L4 w0.15: v1(44.725,49.875) 47.375,49.875 v1(47.75,49.5)
NetR231_1: R231.1 U231.6 | length 4.5
  L1 w0.15: U231.6@78.8,46.975 79.975,46.975 80.25,47.25 80.25,49.25 80,49.5 R231.1@79.45,49.5
NetR232_1: R232.1 U232.6 | length 4.5
  L1 w0.15: U232.6@78.8,55.475 79.975,55.475 80.25,55.75 80.25,57.75 80,58 R232.1@79.45,58
NetR233_1: R233.1 U233.6 | length 4.4
  L1 w0.15: U233.6@78.8,63.975 79.975,63.975 80.2,64.2 80.2,66.3 80,66.5 R233.1@79.45,66.5
NetR234_2: R234.2 U233.4 U233.5 U233.12 | length 15.4
  L1 w0.15: U233.12@73.2,63.325 76,63.325 ; U233.4@78.8,62.675 76.325,62.675 76,63 76,63.325 ; R234.2@79.45,67.5 80.25,67.5 80.5,67.25 80.5,63.75 80.075,63.325 U233.5@78.8,63.325 76,63.325
NetS1_3: S1.3 U101.110 | length 102.5
  L1 w0.15: S1.3@18.999,3.15 18.999,3.999 19.25,4.25 24.25,4.25 27.5,1 v1(66.25,1) ; U101.110@69.75,37.925 v1(69.75,40.25)
  L4 w0.15: v1(66.25,1) 66.25,7.793 63.25,10.793 63.25,11.207 71.293,19.25 72.357,19.25 76.25,23.143 76.25,36.25 72.25,40.25 v1(69.75,40.25)
NetU211A_2: U211A.2 X211A.3 | length 4.1
  L1 w0.15: U211A.2@63.05,57.325 64.925,57.325 65.75,56.5 66.7,56.5 X211A.3@66.8,56.6
NetU211B_2: U211B.2 X211B.3 | length 4.1
  L1 w0.15: U211B.2@63.05,44.325 64.925,44.325 65.75,43.5 66.7,43.5 X211B.3@66.8,43.6
NetU221A_1: U221A.1 U221A.4 | length 3.9
  L1 w0.15: U221A.1@43.3,59.575 42.45,59.575 42.125,59.9 42.125,61.2 42.45,61.525 U221A.4@43.3,61.525
NetU221A_8: U221A.8 X221A.3 | length 4.7
  L1 w0.15: U221A.8@43.3,64.125 44.375,64.125 44.75,64.5 44.75,65.5 45.45,66.2 X221A.3@46.6,66.2
NetU221B_1: U221B.1 U221B.4 | length 3.9
  L1 w0.15: U221B.1@43.3,48.575 42.45,48.575 42.125,48.9 42.125,50.2 42.45,50.525 U221B.4@43.3,50.525
NetU221B_8: U221B.8 X221B.3 | length 4.7
  L1 w0.15: U221B.8@43.3,53.125 44.375,53.125 44.75,53.5 44.75,54.5 45.45,55.2 X221B.3@46.6,55.2
NetU231_12: U231.12 U231.15 U232.14 | length 15.1
  L1 w0.15: U231.15@73.2,44.375 71.625,44.375 71,45 71,46.325 ; U231.12@73.2,46.325 71,46.325 ; U232.14@73.2,53.525 71.525,53.525 71,53 71,46.325
NetU232_4: U232.4 U232.15 | length 6.1
  L1 w0.15: U232.15@73.2,52.875 75.025,52.875 76.325,54.175 U232.4@78.8,54.175
OE: U101.183 U102.28 U103.41 | length 30.1
  L1 w0.15: U103.41@34.5,8.95 v1(34.5,10.2) ; v1(36.75,24.75) 36.75,24.775 36.775,24.775 36.775,25.318 37.207,25.75 U102.28@38.125,25.75 39.65,25.75 42.15,23.25 U101.183@45.075,23.25
  L4 w0.15: v1(34.5,10.2) 35.3,9.4 37.1,9.4 37.5,9.8 37.5,23.827 36.75,24.577 v1(36.75,24.75)
PS: U101.115 U102.12 U103.28 | length 103.4
  L1 w0.15: U103.28@24.1,8.95 24.1,7.1 23.375,6.375 19.625,6.375 18.075,7.925 18.075,20.075 19.6,21.6 22.6,21.6 23.8,22.8 23.8,22.824 24.525,23.549 24.525,29.725 24,30.25 U102.12@18.875,30.25 17.625,30.25 16.6,31.275 16.6,36.501 17.474,37.375 45.225,37.375 46.85,35.75 49.707,35.75 50,35.457 50,35.45 51.15,34.3 64.95,34.3 67.25,36.6 U101.115@67.25,37.925
RADIOS.RX1: P1.7 U231.3 | length 18.1
  L1 w0.15: U231.3@78.8,45.025 82.5,45.025 89.545,52.07 P1.7@93.98,52.07
RADIOS.RX2: P1.5 U231.5 | length 18.6
  L1 w0.15: U231.5@78.8,46.325 82.5,46.325 90.785,54.61 P1.5@93.98,54.61
RADIOS.TX1: P1.1 U232.2 | length 18
  L1 w0.15: U232.2@78.8,52.875 80.875,52.875 82.5,52.875 89.315,59.69 P1.1@93.98,59.69
RADIOS.TX2: P1.3 U232.1 | length 17.2
  L1 w0.15: U232.1@78.8,52.225 82.5,52.225 87.425,57.15 P1.3@93.98,57.15
REPEATER: U231.13 U232.3 | length 13.1
  L1 w0.15: U231.13@73.2,45.675 75.675,45.675 76,46 76,53.2 76.325,53.525 U232.3@78.8,53.525
RESET: U201.12 U203.7 U203.15 | length 26.7
  L1 w0.15: U203.15@18.7,42.375 v1(20.85,42.375) ; v1(25.725,45.625) U203.7@24.3,45.625 23.125,45.625 22.8,45.95 22.8,46.3 24.75,48.25 24.75,52.44 25.365,53.055 29.81,53.055 30.445,52.42 U201.12@30.445,50.675
  L4 w0.15: v1(20.85,42.375) 22.475,42.375 v1(25.725,45.625)
TONE_ON: U201.11 U202.3 | length 7
  L1 w0.15: U202.3@28.8,46.05 27.798,46.05 27.524,46.324 27.524,48.61 27.824,48.91 28.84,48.91 29.175,49.245 U201.11@29.175,50.675
TX_DEVICE: U232.5 U233.3 | length 12.2
  L1 w0.15: U232.5@78.8,54.825 76.65,54.825 76,55.475 76,61.7 76.325,62.025 U233.3@78.8,62.025
WE: U101.179 U102.11 U103.17 | length 61.5
  L1 w0.15: U103.17@24.1,20.05 24.1,22.7 24.825,23.425 24.825,30.1 24.175,30.75 U102.11@18.875,30.75 17.9,30.75 16.9,31.75 16.9,36.377 17.598,37.075 39.825,37.075 41,35.9 41,28.107 43.857,25.25 U101.179@45.075,25.25
pads on no net: S1.0 S1.2 S3.0 S3.2 S3.8 S3.9 U1.4 U101.5 U101.11 U101.12 U101.14 U101.16 U101.18 U101.19 U101.25 U101.30 U101.31 U101.37 U101.38 U101.39 U101.40 U101.41 U101.42 U101.43 U101.45 U101.47 U101.49 U101.51 U101.52 U101.53 U101.61 U101.62 U101.75 U101.85 U101.87 U101.88 U101.90 U101.91 U101.92 U101.117 U101.137 U101.141 U101.143 U101.147 U101.151 U101.153 U101.156 U101.157 U101.158 U101.160 U101.161 U101.162 U101.163 U101.164 U101.166 U101.167 U101.168 U101.170 U101.171 U101.175 U101.176 U101.177 U101.178 U101.180 U101.182 U101.184 U101.185 U101.186 U101.188 U101.190 U101.192 U101.194 U101.195 U101.196 U101.203 U102.10 U102.13 U201.13 U201.15 U201.16 U201.17 U201.18 U201.19 U201.29 U201.30 U201.31 U201.32 U211A.1 U211A.15 U211B.1 U211B.15 U221A.7 U221A.9 U221A.16 U221B.7 U221B.9 U221B.16

## Polygon pours and split planes (outlines as drawn)
3V3 on L2 (split plane): 99.49,0.51 0.51,0.51 0.51,69.49 99.49,69.49
GND on L3 (split plane): 99.49,0.51 0.51,0.51 0.51,69.49 99.49,69.49

## Silkscreen, mask and mechanical layers (free items; w line width, h text height)
Top Overlay:
  lines w0.1: 92.63,39.37 97.71,39.37 ; 92.63,40.64 97.71,40.64

## Text inside footprints (layer, text, board x,y; h text height)
P3: Top Overlay "VCC" at 4.535,29.595 h1.52; Top Overlay "CTS" at 4.535,27.055 h1.52; Top Overlay "GND" at 4.535,24.515 h1.52; Top Overlay "DTR" at 4.535,37.215 h1.52; Top Overlay "RXI" at 4.535,34.675 h1.52; Top Overlay "TXO" at 4.535,32.135 h1.52